# Altium PCB PCB1.PcbDoc (part 2 of 2)
Units mil, origin at the board's own origin, x right, y up, seen from the top; angles counter-clockwise.
Board outline 1275 x 805 mil, 4 copper layers (Top Layer, signal, gnd, Bottom Layer), stack 23.756 mil thick; 62 components, 87 nets, 336 pads, 208 vias.
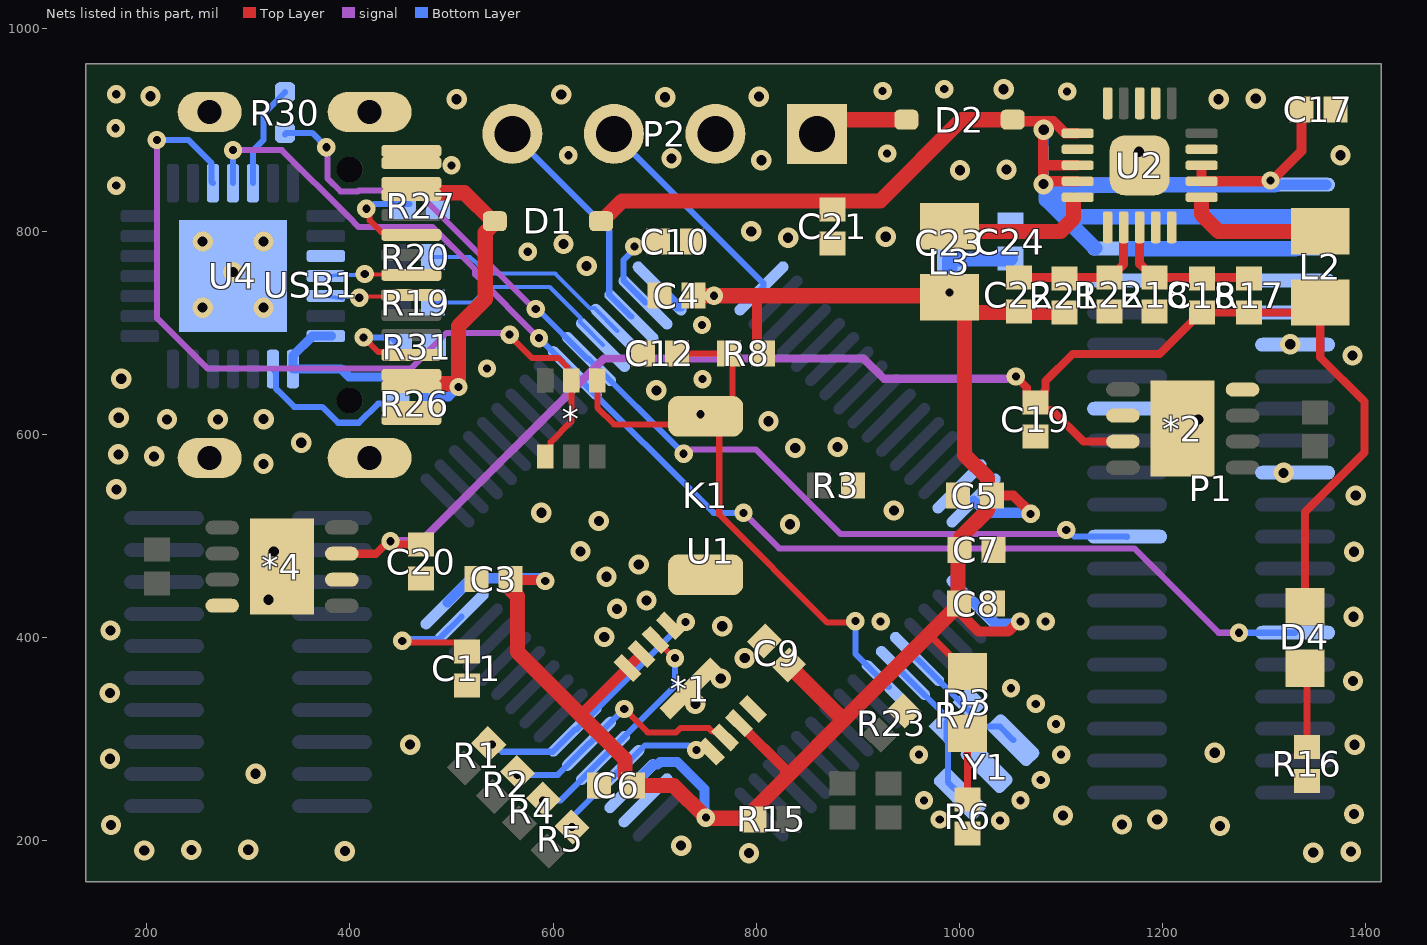
[diagram p4: the nets of this part, all layers, seen from the top]

## Via types
v1: diameter 18, hole 8, Top Layer to Bottom Layer, tented both sides, 118 vias
v2: diameter 20, hole 10, Top Layer to Bottom Layer, tented both sides, 85 vias
v3: diameter 27.56, hole 27.56, Top Layer to Bottom Layer, 4 vias
v4: diameter 18, hole 7.87, Top Layer to Bottom Layer, tented both sides, 1 vias

## Nets (pads, with @x,y where several pads share a name; then routed paths per layer and width w, separated by ;. In a path a pad name is that pad's centre, name@x,y a point inside that pad or via, vN(x,y) a via of type N, cw(c..) or ccw(c..) an arc to the next point about the centre after c; other vN are vias at no path point) (continued)
GND: *1.4 *1.9 *2.2 *2.8 *2.9 *4.2 *4.8 *4.9 C3.1 C4.1 C5.1 C6.1 C7.1 C8.1 C9.1 C10.1 C11.1 C12.1 C17.1 C19.1 C20.1 C21.1 C23.1 C24.1 K1.2 P1.4 P1.5 P1.6 P1.10 P1.33 P1.37 P2.2 R3.1 R6.2 R16.2 R18.1 R22.1 R23.1 R27.1 R31.1 U1.18 U1.63 U2.1 U2.4 U2.5 U2.9 U2.12 U2.13 U2.15 U2.17 U2.21 U4.3 U4.29 USB1.1 USB1.2 USB1.3 USB1.4 USB1.A1 USB1.A12 USB1.B1 USB1.B12 Y1.2 | length 4.4
  Bottom Layer w10: 1235.56,864.44 1240,864.44
  other v1: 1040,220 980.59,221.22 965,240 1060,240 1080,260 960,285 1100,285 1095,315 1075,335 1050.6,350.32 1084.81,416.04 747.14,654.58 535,665 746.56,707.9 575,780 170,845 500,865 615,875 928.79,876.63 169.44,901.54 170,935 924.35,938.23 1105.98,937.69 985,940
  other v2: 792.73,188.06 1348.16,188.58 395,190 1385.22,189.51 197.65,190.61 243.94,191.12 299.97,191.38 726.02,195.43 1256.3,214.67 164.82,215.74 1159.87,216.19 1194.56,221.15 1101.81,225.14 1388.31,226.56 307.23,266.17 163.8,280.91 1251.2,286.93 459.27,294.86 1388.92,294.8 740,335 163.72,345.73 1387.22,357.49 765,360 788.61,379.95 650.32,400.76 164.37,407.23 766.41,411.31 1387.84,420.63 662.94,428.48 319.97,437.43 691.87,436.74 652.56,460.12 684.31,472.16 325,485 626.97,485.06 1388.31,484.71 833.17,511.79 645,515 588.43,523.05 935.37,525.2 1390,540 170.14,546.06 1319.05,562.35 315,571.15 207.33,578.55 172.09,580.5 838.29,586.76 880.02,587.79 352.08,592.05 811.97,613.13 220,615 270,615 315.05,615.18 1235,615 172.48,616.52 701.64,643.53 175,655 1386.8,677.78 1325.5,688.86 255,725 315,725 285,760 632.97,765.93 610.19,787.65 255,790 315,790 831.29,793.71 927.46,794.71 795,800 1000.51,860.15 1046.33,860.76 805,870 716.56,871.83 1375,875 1176.55,878.45 505,930 1255,930 1291.51,930.64 710.23,932.05 203.8,932.97 802.51,932.66 607.99,934.69 1043.46,939.87
  other v4: 922.41,416
Net*_4: *.4 C12.2 K1.1 R8.2 U1.7 | length 623.1
  Top Layer w6: *.4@643.51,653.19 643.51,626.49 660,610 735,610 v1(745,620) K1.1@748.5,616.5 ; C12.2@721.73,680 R8.2@773.27,680 ; K1.1@748.55,616.5 763.51,601.53 763.51,521.49 870,415 896.09,415 v1(897.49,416.4) ; K1.1@750,618 760.07,618 776.54,634.47 R8.2@776.54,670
  Bottom Layer w6: v1(897.49,416.4) 897.49,384.27 U1.7@930.38,351.37
NetC10_2: C10.2 U1.47 | length 94.2
  Top Layer w6: v1(679.96,785.22) 698.05,785.22 698.27,785 C10.2@703.27,790
  Bottom Layer w6: v1(679.96,785.22) 679.96,782.48 669.22,771.74 669.22,751.73 U1.47@690.97,729.98
NetC11_2: C11.2 U1.31 | length 136.2
  Top Layer w6: v1(451.52,396.99) 452.97,395.54 506.19,395.54 C11.2@515,386.73
  Bottom Layer w6: v1(451.52,396.99) 453.38,398.85 487.9,398.85 U1.31@510.02,420.97
NetC18_1: C18.1 R17.1 R18.2 U2.3 | length 149.7
  Top Layer w9: U2.3@1177.29,804.07 1177.29,768.14 1190.98,754.45 R18.2@1191.96,754.45 1284.01,754.45 R17.1@1285,753.46
NetC22_1: C22.1 R21.1 R22.2 U2.2 | length 144.9
  Top Layer w9: C22.1@1058.46,754.45 1147.32,754.45 R22.2@1147.42,754.55 1148.4,754.55 1161.55,767.69 U2.2@1161.55,804.07
NetD2_1: D2.1 P2.1 | length 97.9
  Top Layer w15: P2.1@859.82,896.05 873.77,910 D2.1@951.97,910
NetD3_K: D3.K R6.1 | length 65.2
  Top Layer w7: D3.K@1007.85,306.06 1007.93,305.98 R6.1@1007.93,240.88
NetD4_K: D4.K R16.1 | length 78.1
  Top Layer w7: D4.K@1340,370 1342.04,367.96 R16.1@1342.04,292.7
NetL2_1: L2.1 U2.6 | length 135.3
  Top Layer w15: 1238.29,828.36 1238.29,816.71 1255,800 1354.92,800 L2.1@1355,800.08
NetL3_1: L3.1 U2.20 | length 128.2
  Top Layer w15: L3.1@1007.47,800 1099.59,800 1112.31,812.72 U2.20@1112.31,830.82
NetR7_1: R7.1 U1.5 Y1.1 | length 128
  Bottom Layer w6: U1.5@958.22,379.21 1024.74,312.69 1039.63,312.69 Y1.1@1053.09,299.24
NetR7_2: R7.2 U1.6 Y1.3 | length 144.2
  Bottom Layer w6: U1.6@944.3,365.29 990,319.6 987.46,317.06 987.46,298.89 988.59,297.77 988.59,257.95 Y1.3@1000.19,246.35
NetR26_1: R26.1 U4.9 | length 162
  Bottom Layer w6: U4.9@324.19,664.55 327.19,661.55 327.19,645.27 328.88,643.58 345.14,627.32 372.68,627.32 388.3,611.7 408.85,611.7 427.73,630.57 R26.1@446.92,630.57
NetR27_2: R27.2 USB1.A5 | length 103.9
  Top Layer w6: v1(416.2,822.25) 416.2,819.01 419.39,815.82 419.39,810.8 430.8,799.39 457.55,799.39 USB1.A5@460.45,796.48
  Bottom Layer w6: v1(416.2,822.25) 419.45,822.25 423.97,826.77 R27.2@458.5,826.77
NetR30_2: R30.2 U4.26 | length 102.4
  Bottom Layer w6: U4.26@304.51,847.55 304.51,879.51 315,890 315,915.79 R30.2@336.12,936.91
NetR31_2: R31.2 USB1.B5 | length 99.4
  Top Layer w6: v1(413.51,695.72) 427.95,681.28 457.55,681.28 USB1.B5@460.45,678.37
  Bottom Layer w6: v1(413.51,695.72) 440.59,695.72 446.54,689.78 R31.2@446.54,680
RTS: *.1 *.5 U4.24 | length 812.5
  Top Layer w6: v1(557.22,698.34) 557.22,697.32 579.04,675.5 604.95,675.5 614.15,666.29 614.15,656.96 *.5@617.92,653.19 617.92,612.92 597.6,592.6 597.6,583.65 *.1@592.33,578.38
  signal w6: v1(210,890) 210,715 260,665 460,665 495,700 555.56,700 v1(557.22,698.34)
  Bottom Layer w6: v1(210,890) 241.1,890 251.89,879.21 263.64,867.46 263.64,849.05 U4.24@265.14,847.55
SPI_CS: *1.1 R5.1 U1.20 | length 181.3
  Top Layer w6: v1(741.01,289.61) 741.39,289.61 745.46,293.68 751.02,288.11 *1.1@755.13,288.11
  Bottom Layer w6: v1(618.66,213.66) 620.58,215.58 620.58,225.3 U1.20@663.13,267.86 664.17,267.86 690.32,294 733.37,294 737.76,289.61 v1(741.01,289.61)
SPI_MISO: *1.2 R2.1 U1.22 | length 245.9
  Top Layer w6: v1(670,330) 693.04,306.96 721.13,306.96 725.2,311.03 753.29,311.03 756.71,307.61 763.49,307.61 *1.2@769.06,302.04
  Bottom Layer w6: v1(565,265) 604.6,265 U1.22@635.29,295.7 635.49,295.7 669.8,330 v1(670,330)
SPI_MOSI: *1.5 R1.1 U1.23 | length 266.7
  Top Layer w6: *1.5@714.86,411.89 718.82,407.93 722.93,407.93 v1(730.48,415.48)
  Bottom Layer w6: v1(540,295) 542.71,295 549.84,287.87 599.62,287.87 U1.23@621.37,309.62 622.73,309.62 728.6,415.48 v1(730.48,415.48)
SPI_SCLK: *1.6 R4.1 U1.21 | length 230.6
  Top Layer w6: *1.6@700.95,397.98 701.49,397.98 719.47,380 v1(720,380)
  Bottom Layer w6: v1(590,240) 607.44,240 U1.21@649.21,281.78 719.81,352.37 719.81,379.81 v1(720,380)
SWCLK: P2.3 U1.49 | length 213.8
  Bottom Layer w6: P2.3@659.82,896.05 806.9,748.97 806.9,745.69 U1.49@805.11,743.9
SWDIO: P2.4 U1.46 | length 228.5
  Bottom Layer w6: P2.4@559.82,896.05 655.3,800.57 655.3,737.81 U1.46@677.05,716.06
UART1_RX: P1.29 R30.1 U1.43 | length 1019.2
  signal w6: v1(376.85,882.8) 378.03,881.62 378.03,852.02 390.8,839.26 407.75,839.26 408.75,840.25 464.75,840.25 581.39,723.61 v1(582.86,723.61) ; v1(728.47,581.17) 731.51,581.17 735.86,585.52 799.48,585.52 883,502 1010.15,502 1097.75,502 1101.75,506 v1(1105,506)
  Bottom Layer w6: R30.1@336.12,895.48 337.55,896.91 362.75,896.91 v1(376.85,882.8) ; v1(582.86,723.61) 584.63,723.61 633.93,674.3 U1.43@635.29,674.3 v1@728.45,581.17 ; v1(1105,506) 1106.71,506 1112.96,499.74 1164.74,499.74 P1.29@1165,499.49
UART1_TX: P1.15 U1.42 U4.25 | length 1277
  signal w6: v1(285,880) 333.08,880 398.2,814.88 398.2,814.8 408.75,804.25 481.45,804.25 523.24,762.47 523.24,757.78 586.06,694.96 v1(586.17,694.96) ; v1(787.47,522.99) 822.46,488 1172,488 1255,405 v1(1275,405)
  Bottom Layer w6: U4.25@284.82,847.55 284.91,847.64 284.91,879.91 v1(285,880) ; v1(586.17,694.96) 586.48,694.96 620.38,661.06 U1.42@620.69,661.06 ; U1.42@621.37,660.38 621.37,659.54 757.92,522.99 v1(787.47,522.99) ; v1(1275,405) P1.15@1330.35,405
USB_N: R19.1 U1.44 | length 200.3
  Bottom Layer w4: R19.1@481.73,730 521.16,730 533.86,742.7 533.86,742.84 536.42,745.4 596.7,745.4 626.71,715.38 626.71,710.73 U1.44@649.21,688.22
USB_P: R20.1 U1.45 | length 211.1
  Bottom Layer w4: R20.1@481.73,775 517.74,775 536.2,758.4 602.08,758.4 635.84,724.64 640.63,724.64 U1.45@663.13,702.14
USBD_n: U4.5 USB1.A7 | length 90.5
  Top Layer w4: v1(409.19,734.68) 410.56,736.06 433.38,736.06 433.88,736.55 433.88,740.38 USB1.A7@460.45,737.43
  Bottom Layer w4: U4.5@376.32,736.37 392.32,733.91 392.32,734.6 393.25,735.52 408.35,735.52 v1(409.19,734.68)
USBD_P: U4.4 USB1.A6 | length 87
  Top Layer w4: v1(414.65,758.05) 415.12,757.58 433,757.58 433.88,758.46 433.88,760.07 USB1.A6@460.45,757.11
  Bottom Layer w4: U4.4@376.32,756.05 392.32,757.28 392.56,757.05 413.65,757.05 v1(414.65,758.05)
VBUS: D1.1 R26.2 U4.7 U4.8 USB1.A4 USB1.A9 USB1.B4 USB1.B9 | length 580.4
  Top Layer w6: USB1.B4@454.6,652.83 USB1.B4@460.45,658.69 ; USB1.A9@460.45,646.88 USB1.B4@460.45,655.78
  Top Layer w15: USB1.A9@462.05,648.47 487.4,648.47 489.07,650.14 502.8,650.14 506.07,646.88 v1(506.88,646.88) 506.88,706.88 533.13,733.13 533.13,798.87 538.35,804.09 538.35,807.66 D1.1@540.69,810 ; USB1.B9@462.05,837.45 487.4,837.45 487.93,837.98 512.71,837.98 D1.1@540.69,810 ; D1.1@542.66,810 D1.1@540.69,810
  Bottom Layer w9: U4.7@382,697 U4.7@376.32,697 363.32,697 343.88,677.55 U4.8@343.88,664.55 391.29,664.55 399.05,656.79 460.6,656.79 473.07,644.31 473.07,637.88 R26.2@480.38,630.57 487.08,637.27 497.27,637.27 v1(506.88,646.88)
VCC3V3: *1.3 *1.7 *1.8 C3.2 C4.2 C5.2 C6.2 C7.2 C8.2 C9.2 C22.2 C23.2 C24.2 D3.A L3.2 R8.1 R15.1 R21.2 U1.1 U1.19 U1.32 U1.48 U1.64 | length 2360.9
  Top Layer w6: C8.2@999.51,425.49 C8.2@999.51,433.66 ; v1(1070,522) v1@1070,523
  Top Layer w7: 975.92,397.64 1006.86,366.69 D3.A@1007.85,366.69
  Top Layer w9: R8.1@800.72,686.01 R8.1@806.73,680
  Top Layer w10: C3.2@558.3,457.8 558.98,458.48 560.63,456.83 591.34,456.83 v1(592.31,455.86) ; 628.06,325.09 *1.8@673.11,370.13 *1.7@683.95,380.98 ; *1.3@782.98,315.95 830.92,268.01 ; R8.1@800.72,686.01 800.72,736.73 ; C8.2@999.51,425.49 1018.89,406.11 1047.85,406.11 1057.7,415.96 v1(1059.87,415.96) ; C5.2@1031.73,540 1053,540 v1@1070,523
  Top Layer w15: C3.2@556.04,455.69 556.04,450.08 565,441.13 565,386.13 628.06,323.06 ; 628.06,325.09 628.06,323.06 ; C6.2@675,260 670.69,264.31 670.69,280.44 628.06,323.06 ; C6.2@680.3,254.7 680.3,252.04 682.94,249.39 682.94,254.69 718.67,254.69 v1(750.35,223.01) 750.92,222.44 794.15,222.44 R15.1@794.15,224.85 ; C4.2@738.4,736.73 v1(758.36,736.7) 778.3,736.7 ; 778.3,736.73 800.72,736.73 973.27,736.73 989.85,720.15 L3.2@1004.85,720.15 ; R15.1@791.69,224.85 830.92,264.08 ; 830.92,268.01 830.92,264.08 ; C9.2@831.83,373.17 885.92,319.08 ; C8.2@999.51,432.67 885.92,319.08 ; C8.2@999.51,433.66 998.47,434.7 998.47,478.07 997.43,479.12 1001.74,483.43 1001.74,499.77 1027.42,525.46 1027.42,535.69 C5.2@1031.73,540 1027.42,544.31 1027.42,557.58 1005,580 1005,720 L3.2@1004.85,720.15 ; R21.2@1103.19,720.15 1058.46,720.15 L3.2@1004.85,720.15 ; 830.92,264.08 885.92,319.08
  Bottom Layer w10: U1.32@496.1,434.89 517.45,456.24 521.94,456.24 524.34,458.64 587.36,458.64 590.14,455.86 v1(592.31,455.86) ; U1.19@677.05,253.94 698.4,275.29 702.89,275.29 705.29,277.69 722.31,277.69 749.01,250.99 749.01,224.35 v1(750.35,223.01) ; U1.48@704.89,743.9 722.62,726.17 725.9,726.17 736.44,736.7 v1(758.36,736.7) ; U1.1@1013.9,434.89 1014.37,434.89 1035.53,413.73 1035.53,413.83 1055.57,413.83 1057.7,415.96 v1(1059.87,415.96) ; U1.64@1013.9,535.11 1026.01,523 1069,523 v1(1070,522)
  Bottom Layer w15: v1(990,740) 990,740.27 990.42,740.69 C23.2@990.42,772.29 990.91,772.78 1049.51,772.78 C24.2@1050,773.27
VCC_5V: C17.2 C21.2 D1.2 D2.2 P1.1 P1.2 P1.3 P1.38 P1.39 P1.40 U2.7 U2.8 U2.16 U2.18 U2.19 | length 1688.5
  Top Layer w10: D2.2@1052.34,910 1054,908.34 1092.38,908.34 ; 1082.26,883.4 1082.26,898.21 1092.38,908.34 ; 1082.36,882.76 1082.36,865.09 ; U2.19@1116.25,849.32 1088.26,849.32 1085.43,846.5 v2(1082.73,846.5) 1082.36,846.87 1082.36,865.09 ; U2.18@1116.27,865.09 1082.36,865.09 ; U2.16@1116.27,896.58 1104.14,896.58 1092.38,908.34 ; U2.8@1238.32,864.45 U2.7@1238.32,849.34 1305.4,849.34 v1(1306.16,850.1) 1307.56,850.1 1336.54,879.08 C17.2@1336.54,920
  Top Layer w15: D1.2@647.34,810 649.31,810 651.65,812.34 651.65,813.87 667.78,830 922,830 1002,910 D2.2@1052.34,910
  Bottom Layer w6: v2(1082.73,846.5) v2@1082.82,846.59 ; v2@1082.82,899.89 v2(1082.91,899.98)
  Bottom Layer w10: v2@1082.82,846.59 v2@1082.82,899.89 ; v1(1306.16,850.1) 1310.32,845.94 P1.1@1330.35,845.94 P1.1@1361.09,845.94 ; P1.3@1330.35,782.95 P1.3@1361.09,782.95
  Bottom Layer w15: v2@1084.88,845.39 v2@1085.46,844.81 ; P1.38@1133.13,783.56 1085.46,831.23 v2@1085.46,844.81 ; P1.38@1165,782.95 P1.3@1330.35,782.95 ; P1.1@1310.32,845.94 P1.40@1165,845.94 1164.39,845.33 1131.91,845.33 1131.38,844.81 v2@1085.46,844.81 ; P1.2@1330.35,814.45 P1.39@1165,814.45 1115.82,814.45 v2@1085.46,844.81
VCC_CAN: *2.3 *4.3 C18.2 C19.2 C20.2 D4.A L2.2 R17.2 | length 1581.6
  Top Layer w8: *4.3@392,482.76 425.6,482.76 437.84,495 v1(440,495) 442.16,495 445.43,491.73 C20.2@470,491.73 ; v1(1055.45,657.26) 1066.2,646.5 1066.2,639.54 1074.02,631.73 C19.2@1075,631.73 ; *2.3@1160.84,593.11 1122.07,593.11 1091.26,623.92 1083.8,623.92 1082.9,624.82 1082.9,638 1083.8,638.89 1083.8,643.23 1084.8,644.23 1084.8,652.66 1111.42,679.28 1196.78,679.28 1237.83,720.33 C18.2@1238.81,720.33 1285,720.33 1345.33,720.33 L2.2@1355,730 1355,676.14 1398.7,632.44 1398.7,582.38 1340,523.69 D4.A@1340,430.63
  signal w8: v1(440,495) 470,495 650,675 905.51,675 925.51,655 1046.11,655 1046.46,655.35 1053.53,655.35 v1(1055.45,657.26)
pads on no net: *2.5 *4.5 U2.10 U2.11 U2.14 U4.1 U4.2 U4.6 U4.10 U4.11 U4.12 U4.13 U4.14 U4.15 U4.16 U4.17 U4.18 U4.19 U4.20 U4.21 U4.22 U4.23 U4.27 USB1.0 USB1.A8 USB1.B8
copper on no net:
  other v3: 349.04,198.89 1296.89,212.09 349.04,553.22 1296.89,881.38

## Polygon pours and split planes (outlines as drawn)
GND on Bottom Layer "GND_L04_P004" (solid, remove dead copper, pour order 4): 130,980 1430,980 1430,145 125,145
VCC_5V on Bottom Layer "VCC_5V_L04_P000" (solid, remove dead copper, pour order 0): 1079.49,844.88 1080.62,846.01 1370,846.01 1370,783 1354.5,783.63 1127.16,783.63
GND on signal "GND_L02_P002" (solid, remove dead copper, pour order 2): 130,980 1430,980 1430,145 125,145
GND on gnd "GND_L03_P003" (solid, remove dead copper, pour order 3): 130,980 1430,980 1430,145 125,145
GND on Top Layer "GND_L01_P001" (solid, remove dead copper, pour order 1): 130,980 1430,980 1430,145 125,145

## Keep-outs
Keep-Out Layer:
  the board outline again, w10

## Other copper
Top Layer:
  region net VCC_5V: 892.91,822.66 ccw(c892.72,817.55) 887.61,817.78 887.61,822.66
  region net VCC_5V: 862.28,817.3 ccw(c857.17,817.49) 857.4,822.6 862.28,822.6
  region net NetD3_K: 999.48,252.63 ccw(c999.67,257.74) 1004.78,257.51 1004.78,252.63
  region net NetD3_K: 1011.39,257.4 ccw(c1016.5,257.22) 1016.27,252.1 1011.39,252.1
  region net NetD3_K: 1016.69,288.01 ccw(c1016.5,282.89) 1011.39,283.13 1011.39,288.01
  region net NetD3_K: 1004.57,282.5 ccw(c999.46,282.69) 999.69,287.8 1004.57,287.8
  region net RTS: 616.66,667.83 ccw(c619.44,668.16) 617.7,665.97 ccw(c619.89,667.71) 619.56,664.92 616.66,664.92
  region net VCC3V3: 755.23,729.25 ccw(c755.04,724.13) 749.93,724.37 749.93,729.25
  region net VCC3V3: 750.14,749.13 ccw(c755.25,748.94) 755.02,743.83 750.14,743.83
  region net NetL2_1: 1251.01,828.92 ccw(c1250.82,823.8) 1245.71,824.04 1245.71,828.92
  region net NetL2_1: 1230.86,823.59 ccw(c1225.74,823.78) 1225.98,828.89 1230.86,828.89
  region net CAN1_N: 1362.45,599.94 ccw(c1366.99,600.32) 1367.33,595.78 1362.45,595.78
  region net CAN1_N: 1367.64,592 ccw(c1367.46,586.89) 1362.34,587.12 1362.34,592
  region net CAN1_P: 1367.73,616.05 ccw(c1367.54,610.93) 1362.43,611.17 1362.43,616.05
  region net CAN1_P: 1362.22,625.11 ccw(c1367.33,624.93) 1367.09,619.81 1362.22,619.81
  region net Net*_4: 784.74,667.28 ccw(c784.55,662.17) 779.44,662.4 779.44,667.28
  region net Net*_4: 773.56,661.99 ccw(c768.45,662.18) 768.68,667.29 773.56,667.29
  region net Net*_4: 768.36,637.96 ccw(c768.55,643.08) 773.66,642.84 773.66,637.96
  region net Net*_4: 771.73,598.05 ccw(c771.54,592.93) 766.43,593.17 766.43,598.05
  region net Net*_4: 760.58,592.78 ccw(c755.47,592.97) 755.7,598.08 760.58,598.08
  region net NetC18_1: 1272.34,744.75 ccw(c1267.22,744.94) 1267.46,750.05 1272.34,750.05
  region net NetC18_1: 1267.25,758.84 ccw(c1267.44,763.96) 1272.55,763.72 1272.55,758.84
  region net NetC18_1: 1251.4,763.82 ccw(c1256.51,763.63) 1256.28,758.52 1251.4,758.52
  region net NetC18_1: 1226.28,744.71 ccw(c1221.16,744.89) 1221.4,750 1226.28,750
  region net NetC18_1: 1220.75,758.84 ccw(c1220.93,763.96) 1226.05,763.72 1226.05,758.84
  region net NetC18_1: 1256.71,750.11 ccw(c1256.53,744.99) 1251.41,745.23 1251.41,750.11
  region net NetC18_1: 1210,750.36 ccw(c1209.81,745.25) 1204.7,745.48 1204.7,750.36
  region net NetC18_1: 1204.59,764.07 ccw(c1209.71,763.89) 1209.47,758.77 1204.59,758.77
  region net NetC22_1: 1076.37,750.26 ccw(c1076.18,745.14) 1071.07,745.38 1071.07,750.26
  region net NetC22_1: 1090.46,744.69 ccw(c1085.35,744.87) 1085.58,749.99 1090.46,749.99
  region net NetC22_1: 1121.17,750.06 ccw(c1120.98,744.94) 1115.87,745.18 1115.87,750.06
  region net NetC22_1: 1134.93,744.82 ccw(c1129.82,745) 1130.05,750.12 1134.93,750.12
  region net NetC22_1: 1129.49,758.75 ccw(c1129.68,763.87) 1134.79,763.63 1134.79,758.75
  region net NetC22_1: 1085.29,758.81 ccw(c1085.47,763.92) 1090.59,763.69 1090.59,758.81
  region net NetC22_1: 1115.78,764.21 ccw(c1120.9,764.02) 1120.66,758.91 1115.78,758.91
  region net NetC22_1: 1071.15,764.21 ccw(c1076.26,764.02) 1076.03,758.91 1071.15,758.91
  region net VCC3V3: 805.68,697.84 ccw(c810.79,697.65) 810.55,692.54 805.68,692.54
  region net Net*_4: 651.74,641.42 ccw(c651.55,636.31) 646.44,636.54 646.44,641.42
  region net Net*_4: 640.65,636.09 ccw(c635.53,636.28) 635.77,641.39 640.65,641.39
  region net Net*_4: 714.57,602.87 ccw(c709.33,601.99) 708.5,607.24 713.38,607.24
  region net Net*_4: 707.76,612.92 ccw(c707.95,618.03) 713.06,617.79 713.06,612.92
  region net Net*_4: 738.81,677.06 ccw(c738.63,671.95) 733.51,672.18 733.51,677.06
  region net Net*_4: 733.44,688.28 ccw(c738.56,688.09) 738.32,682.98 733.44,682.98
  region net Net*_4: 761.62,671.81 ccw(c756.51,672) 756.74,677.11 761.62,677.11
  region net Net*_4: 756.29,682.89 ccw(c756.48,688) 761.59,687.77 761.59,682.89
  region net BOOT0: 849.78,551.91 ccw(c844.66,552.1) 844.9,557.21 849.78,557.21
  region net BOOT0: 651.68,589.56 ccw(c656.04,590.12) 656.56,585.77 651.68,585.77
  region net BOOT0: 657.06,580.01 ccw(c656.87,574.89) 651.76,575.13 651.76,580.01
  region net DTR: 620.19,566.75 ccw(c619.08,562.79) 615.13,563.93 614.9,566.75
  region net RTS: 589.39,589.73 ccw(c589.99,594.86) 595.12,594.21 594.69,589.73
  region net RTS: 625.99,641.43 ccw(c625.8,636.31) 620.69,636.55 620.69,641.43
  region net RTS: 615.05,636.26 ccw(c609.93,636.45) 610.17,641.56 615.05,641.56
  region net DTR: 600.6,641.66 ccw(c600.42,636.55) 595.3,636.78 595.3,641.66
  region net DTR: 589.4,636.3 ccw(c584.29,636.49) 584.52,641.6 589.4,641.6
  region net DTR: 584.37,653.9 ccw(c579.25,654.09) 579.49,659.2 584.37,659.2
  region net VCC3V3: 989.07,499.36 ccw(c990.07,504.77) 995.48,503.72 994.37,499.36
  region net VCC3V3: 1040.14,527.35 ccw(c1039.79,521.53) 1033.98,521.94 1034.84,527.35
  region net VCC3V3: 1048.74,535.14 ccw(c1048.56,530.02) 1043.44,530.26 1043.44,535.14
  region net VCC3V3: 1043.43,550.17 ccw(c1048.54,549.99) 1048.31,544.87 1043.43,544.87
  region net VCC3V3: 1034.67,558.04 ccw(c1039.79,557.85) 1039.55,552.74 1034.67,552.74
  region net NetD4_K: 1345.47,309.71 ccw(c1350.59,309.52) 1350.35,304.41 1345.47,304.41
  region net NetD4_K: 1333.53,304.39 ccw(c1333.71,309.5) 1338.83,309.27 1338.83,304.39
  region net NetD4_K: 1350.74,351.71 ccw(c1350.55,346.59) 1345.44,346.83 1345.44,351.71
  region net NetD4_K: 1338.63,346.59 ccw(c1333.51,346.78) 1333.75,351.89 1338.63,351.89
  region net VCC_CAN: 1330.72,448.7 ccw(c1330.91,453.82) 1336.02,453.58 1336.02,448.7
  region net VCC_CAN: 1343.75,453.95 ccw(c1348.86,453.76) 1348.63,448.65 1343.75,448.65
  region net VCC_CAN: 1364.25,707.23 ccw(c1364.07,702.12) 1358.95,702.35 1358.95,707.23
  region net VCC_CAN: 1351.1,702 ccw(c1345.99,702.19) 1346.22,707.3 1351.1,707.3
  region net VCC_CAN: 1256.8,716.4 ccw(c1256.61,711.28) 1251.5,711.52 1251.5,716.4
  region net VCC_CAN: 1251.52,729.53 ccw(c1256.63,729.34) 1256.4,724.23 1251.52,724.23
  region net VCC_CAN: 1272.28,711.13 ccw(c1267.16,711.32) 1267.4,716.43 1272.28,716.43
  region net VCC_CAN: 1266.99,724.22 ccw(c1267.17,729.33) 1272.29,729.1 1272.29,724.22
  region net VCC_CAN: 1303.05,716.44 ccw(c1302.86,711.33) 1297.75,711.56 1297.75,716.44
  region net VCC_CAN: 1297.62,729.36 ccw(c1302.73,729.17) 1302.5,724.06 1297.62,724.06
  region net VCC_CAN: 1326.13,711.06 ccw(c1321.01,711.25) 1321.25,716.36 1326.13,716.36
  region net VCC_CAN: 1320.8,724.26 ccw(c1320.99,729.37) 1326.1,729.13 1326.1,724.26
  region net NetL2_1: 1326.13,787.42 ccw(c1321.02,787.61) 1321.25,792.72 1326.13,792.72
  region net NetL2_1: 1321.04,807.35 ccw(c1321.23,812.47) 1326.34,812.23 1326.34,807.35
  region net VCC_5V: 1346.71,907.3 ccw(c1346.52,902.19) 1341.41,902.43 1341.41,907.3
  region net VCC_5V: 1331.71,902.15 ccw(c1326.59,902.34) 1326.83,907.45 1331.71,907.45
  region net VCC_5V: 1087.97,857.92 ccw(c1093.08,857.73) 1092.85,852.62 1087.97,852.62
  region net VBUS: 489.85,850.67 ccw(c494.96,850.49) 494.73,845.37 489.85,845.37
  region net VBUS: 489.67,662.71 ccw(c494.79,662.52) 494.55,657.41 489.67,657.41
  region net VBUS: 494.24,657.53 ccw(c494.43,662.64) 499.54,662.41 499.54,657.53
  region net CAN1_N: 1337.27,586.04 ccw(c1332.16,586.23) 1332.39,591.34 1337.27,591.34
  region net CAN1_N: 1331.99,594.57 ccw(c1332.18,599.69) 1337.29,599.45 1337.29,594.57
  region net CAN1_P: 1337.5,611.61 ccw(c1332.39,611.79) 1332.62,616.91 1337.5,616.91
  region net CAN1_P: 1332.09,620.62 ccw(c1332.28,625.74) 1337.39,625.5 1337.39,620.62
  region net CAN2_P: 193.84,461.46 ccw(c193.9,464.86) 197.3,464.77 197.3,461.46
  region net CAN2_P: 197.32,452.24 ccw(c192.2,452.43) 192.44,457.54 197.32,457.54
  region net CAN2_P: 228.06,455.22 ccw(c227.87,450.1) 222.76,450.34 222.76,455.22
  region net CAN2_P: 222.65,464.3 ccw(c227.76,464.11) 227.53,459 222.65,459
  region net CAN2_N: 197.31,475.13 ccw(c192.37,475.15) 192.43,480.09 197.31,480.09
  region net CAN2_N: 191.95,483.91 ccw(c192.14,489.02) 197.25,488.79 197.25,483.91
  region net CAN2_N: 228.04,479.9 ccw(c227.85,474.79) 222.74,475.03 222.74,479.9
  region net CAN2_N: 222.68,489.13 ccw(c227.8,488.95) 227.56,483.84 222.68,483.84
  region net NetC11_2: 502.56,380 ccw(c489.8,380.15) 490.07,392.91 502.56,392.91
  region net VCC_5V: 1097.25,860.11 ccw(c1096.89,850.19) 1086.98,850.65 1086.98,870.38
  region net VCC_5V: 1101.04,892.87 ccw(c1097.84,882.61) 1087.13,881.73 1087.13,902.62 1096.69,900.95
  region net VCC3V3: 675.36,359.62 ccw(c672.45,356.08) 668.94,359.01 672.45,362.52
  region net VCC3V3: 662.63,366.54 ccw(c659.09,369.44) 662.03,372.95 665.54,369.45
  region net VCC3V3: 683.49,373.53 ccw(c686.37,370.68) 683.49,367.83 680.59,370.62
  region net VCC3V3: 689.33,373.59 ccw(c686.43,370.05) 682.91,372.98 686.42,376.49
  region net VCC3V3: 671.25,380.08 ccw(c673.71,383.61) 677.23,381.12 673.72,377.61
  region net VCC3V3: 676.19,380.09 ccw(c673.54,383.44) 676.92,386.05 679.7,383.27
  region net VCC3V3: 990.75,413.86 ccw(c1002.46,400.44) 988.93,388.86 977.34,400.45
  region net VCC3V3: 986.36,382.48 ccw(c972.95,370.77) 961.36,384.29 972.95,395.89
  region net VCC3V3: 1011.01,407.11 ccw(c997.59,395.39) 986.01,408.92 997.6,420.51
  region net VCC3V3: 872.38,342.87 ccw(c885.8,354.58) 897.38,341.06 885.79,329.46
  region net VCC3V3: 796.16,719.62 ccw(c786,719.31) 785.78,729.48 796.16,729.48
  region net VCC3V3: 815.48,729.62 ccw(c815.8,719.45) 805.63,719.23 805.63,729.62
  region net VCC3V3: 615.41,345.7 ccw(c628.83,357.42) 640.41,343.89 628.82,332.3
  region net VCC3V3: 648.82,339.3 ccw(c660.53,325.88) 647,314.3 635.41,325.89
  region net VCC3V3: 810.93,254.31 ccw(c799.22,267.73) 812.75,279.31 824.34,267.72
  region net VCC3V3: 817.83,288.07 ccw(c831.25,299.78) 842.83,286.25 831.24,274.66
  region net VCC3V3: 862.36,305.82 ccw(c850.65,319.23) 864.18,330.81 875.77,319.22
  region net VCC3V3: 961.33,712.66 ccw(c942.93,711.15) 941.6,729.57 961.33,729.57
  region net VCC3V3: 943.08,743.91 ccw(c945.19,759.96) 961.21,757.69 961.63,743.98
  region net VCC3V3: 1018.74,746.01 ccw(c1038,746.72) 1038.54,727.45 1018.81,727.45
  region net NetL3_1: 1028.71,792.59 ccw(c1029.02,782.42) 1018.85,782.21 1018.85,792.59
  region net NetL3_1: 1018.83,825.93 ccw(c1038.1,826.65) 1038.63,807.38 1018.9,807.38
  region net NetL3_1: 1105.13,824.57 ccw(c1101.47,825.34) 1102.28,828.99 1105.13,828.99
  region net NetL3_1: 1129.03,829.05 ccw(c1128.97,819.78) 1119.71,819.92 1119.71,829.05
  region net VCC_5V: 1084.66,887.44 ccw(c1103.93,888.16) 1104.46,868.89 1084.73,868.89
  region net VCC_5V: 1077.52,882.58 ccw(c1059.41,882.09) 1058.49,900.18 1061.97,906.34 1080.36,903.58
Bottom Layer:
  region net 15: 1147.94,236.27 ccw(c1144.61,237.33) 1145.7,240.65 1152.02,240.65
  region net NetR26_1: 435.35,621.86 ccw(c429.2,621.63) 429.03,627.78 435.35,627.78
  region net NetR26_1: 429.39,633.27 ccw(c429.16,639.42) 435.31,639.59 435.31,633.27
  region net VBUS: 355.63,660.16 ccw(c355.85,654.01) 349.7,653.84 349.7,660.16
  region net VBUS: 349.72,674.93 ccw(c355.87,675.16) 356.04,669.01 349.72,669.01
  region net SWCLK: 796.35,742.62 ccw(c789.74,749.16) 796.35,755.7 802.89,749.16
  region net SWCLK: 800.12,759.76 ccw(c806.66,766.37) 813.2,759.76 806.66,753.22
  region net VCC3V3: 1029.84,544.55 ccw(c1040.06,534.42) 1029.84,524.29 1019.71,534.42
  region net VCC3V3: 1022.71,519.41 ccw(c1013.7,509.38) 1003.76,518.49 1013.89,528.62
  region net 16: 1350.57,240.98 ccw(c1350.63,228.29) 1337.94,228.35 1337.58,240.98
  region net 16: 1332.5,228.18 ccw(c1319.81,228.12) 1319.87,240.81 1332.5,241.16
  region net 37: 211.9,537.09 ccw(c231.17,537.81) 231.7,518.53 211.97,518.53
  region net 37: 189.89,518.56 ccw(c189.17,537.83) 208.44,538.36 208.44,518.63
  region net VCC_5V: 1087.43,870.82 ccw(c1106.7,871.53) 1107.23,852.26 1087.5,852.26
  region net VCC_5V: 1122.12,837.42 ccw(c1125.74,827.76) 1116.05,824.23 1103.56,837.35
  region net VCC_5V: 1134.3,807.49 ccw(c1137.54,798.43) 1128.45,795.28 1115.75,807.42

## Silkscreen, mask and mechanical layers (free items; w line width, h text height)
Top Overlay:
  drawing of 8 lines, arcs and shapes, not listed
  text "RSET" at 812,447 h40
  text "D" at 165,325 h60
  text "C" at 245,325 h60
  text "G" at 315,325 h60
  text "5V" at 390,325 h60